# Altium PCB Node_Unit_Board.PcbDoc
Units mm, origin at the board's own origin, x right, y up, seen from the top; angles counter-clockwise.
Board outline 72.39 x 79.25 mm, 2 copper layers (Top Layer, Bottom Layer); 17 components, 15 nets, 100 pads, 0 vias.
Unrouted connection lines stored in the file: 5.
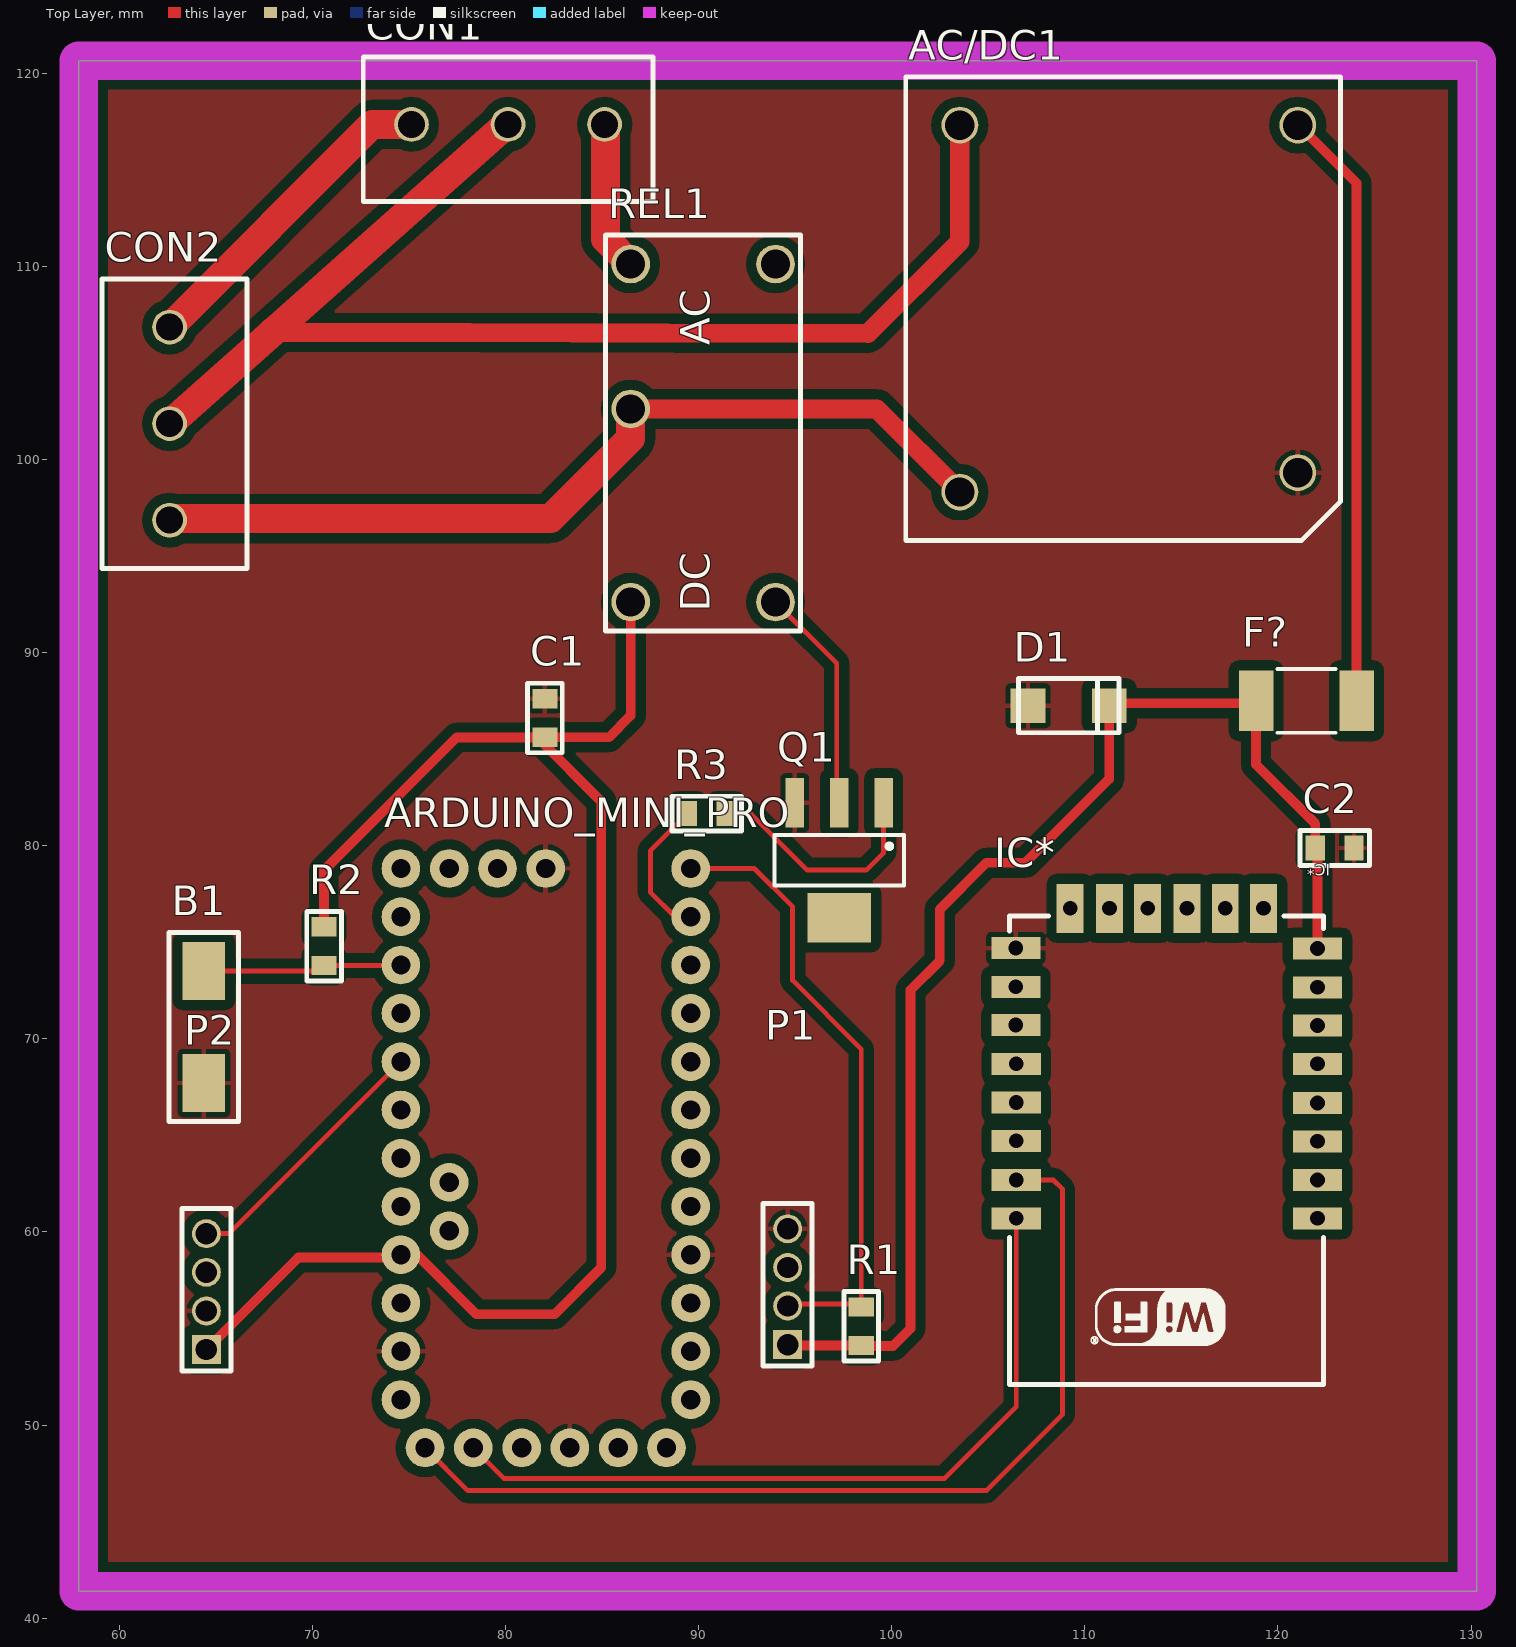
[diagram p0: Top Layer view]
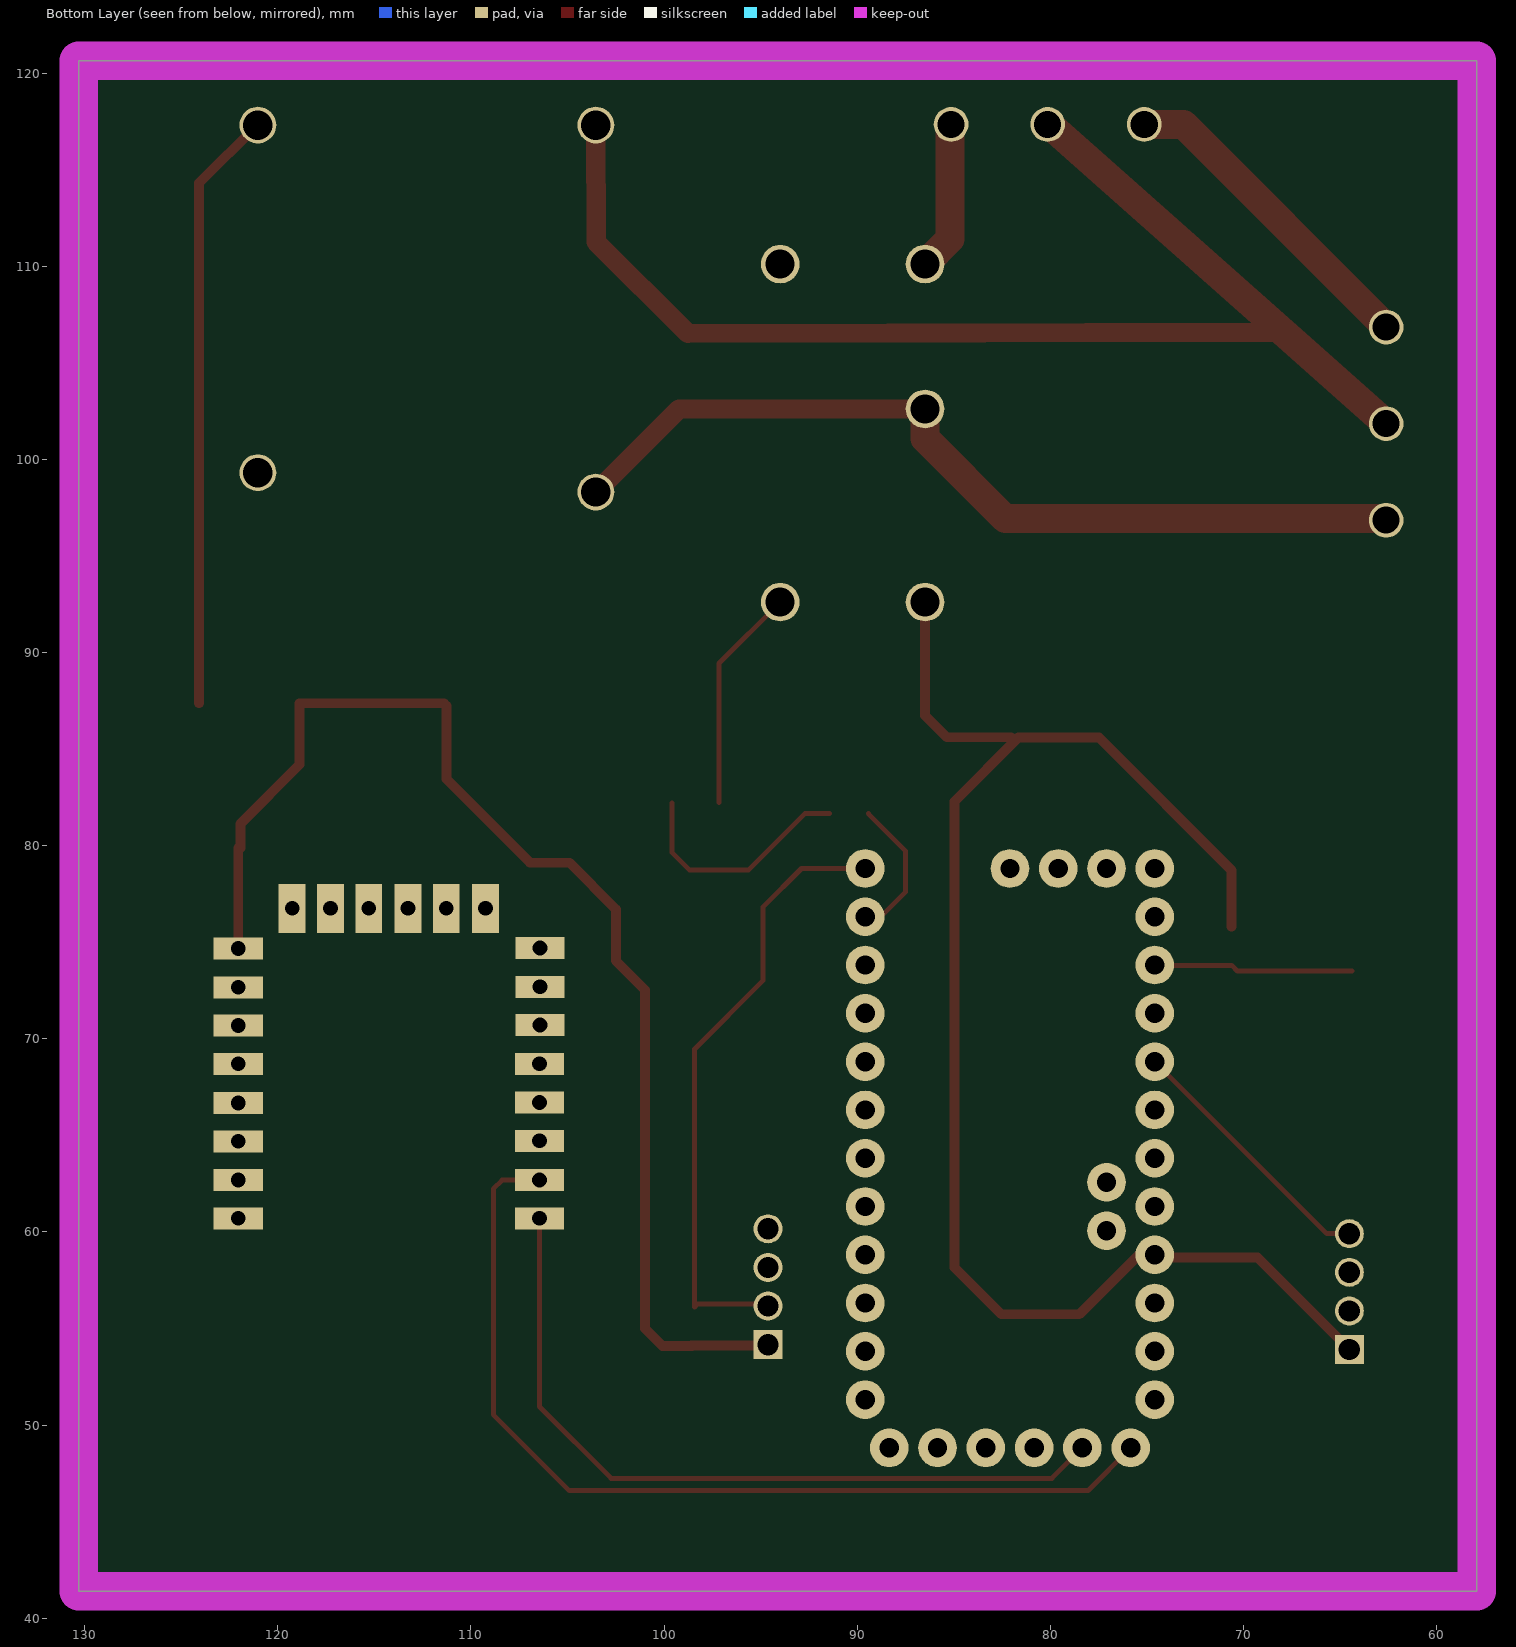
[diagram p1: Bottom Layer view, seen from below]

## Layer stack, top to bottom
Top Solder: solder mask 0.0102, Solder Resist, Dk 3.5
Top Layer: signal copper 0.0356
Dielectric 1: dielectric 0.32, FR-4, Dk 4.8
Bottom Layer: signal copper 0.0356
Bottom Solder: solder mask 0.0102, Solder Resist, Dk 3.5

## Board outline
57.912,120.65 57.912,41.402 130.302,41.402 130.302,120.65

## Design rules (kind name [scope] priority, off if disabled: settings)
Clearance Clearance_Poly [InPoly vs not InNet('GND')] p1: gap=0.508 ignorepadtopadclearanceinfootprint=FALSE
Clearance [All] p2: gap=0.254 ignorepadtopadclearanceinfootprint=FALSE except(0: Arc-Hole Track-Hole SMDPad-Hole THPad-Hole Via-Hole Fill-Hole Poly-Hole Region-Hole Text-Hole)
PolygonConnect [All] p1: connectstyle=Relief reliefconductorwidth=0.254 reliefentries=4 polygonreliefangle="90 Angle" airgapwidth=0.254
RoutingLayers [All] p1: top layer_v5=TRUE bottom layer_v5=FALSE
RoutingVias [All] p1: holewidth=0.711 width=1.27 viastyle="Through Hole" minholewidth=0.711 minwidth=1.27 maxholewidth=0.711 maxwidth=1.27
SilkToSilkClearance [All] p1 off: silktosilkclearance=0.254
SolderMaskExpansion [All] p1: expansion=0.102
Width [All] p1: maxlimit=2 minlimit=0.254 preferedwidth=0.254
28 further rules are at their usual default settings.

## Components (designator, comment, footprint, x,y, rotation, side; value= is the part's Value field where it differs from the comment)
AC/DC1 "AC/DC Converter" "AC/DC Converter" 103.531,117.314 r0 top
ARDUINO_MINI_PRO "ARDUINO_MINI_PRO" ARDUINO_MINI_PRO 87.089,52.821 r180 top
B1 "Button small" FP_BTN_SMD_3x6 64.389,70.612 r270 top
C1 "10uF" FP_0805_CAP_085 82.042,86.614 r90 top
C2 "10uF" FP_0805_CAP_085 122.936,79.883 r0 top
CON1 "Conector_Screws" Serial_Connector 80.137,117.348 r0 top
CON2 "Conector_Screws" Serial_Connector 62.611,101.854 r90 top
D1 "ZENER" FP_SMA 107.061,87.249 r0 top
F? "Multifuse" FP_1812_MULTIFUSE 121.472,87.503 r180 top
IC* "ESP8266 ESP-12-E" "ESP8266 ESP-12-E" 105.461,77.114 r180 top
P1 "Connector" FP_CONN4_TUSKE_2MM 94.615,60.166 r0 top
P2 "Connector" FP_CONN4_TUSKE_2MM 64.516,59.912 r0 top
Q1 "NMOS" FP_SOT223 97.282,79.248 r270 top
R1 "10K" FP_0805_RES 98.425,55.118 r270 top
R2 "10K" FP_0805_RES 70.612,74.803 r270 top
R3 "10K" FP_0805_RES 90.424,81.661 r180 top
REL1 "Power Relay 3VDC" "PowerRelay 3V" 86.487,92.616 r90 top

## Footprints (in the part's own frame and the unit in brackets; to place one, negate y for a bottom-side part, rotate by r counter-clockwise, add the part's x,y. Pads: shape width x height; smd on the part's side, far side on the other; paste and mask are expansions set on the pad)
"AC/DC Converter" [mm]
  round 1.905 hole 1.524: 1(17.5,-18) 2(17.5,0) 3(0,0) 4(0,-19)
  silkscreen extent -2.8,-21.5 19.7,2.5
ARDUINO_MINI_PRO [mm]
  round 2 hole 1: 2(-2.5,-8.5) 2(1.25,4) 3(-2.5,-11) 3(-1.25,4) 4(-2.5,-13.5) 5(-2.5,-16) 6(-2.5,-18.5) 7(-2.5,-21) 8(-2.5,-23.5) 9(-2.5,-26) 10(12.5,-26) 11(12.5,-23.5) 12(12.5,-21) 13(12.5,-18.5) A0(12.5,-16) A1(12.5,-13.5) A2(12.5,-11) A3(12.5,-8.5) A6(7.5,-26) A7(10,-26) GND(-2.5,-6) GND(3.75,4) GND(5,-26) GND(12.5,-1) RAW(12.5,1.5) RST(-2.5,-3.5) RST(6.25,4) RST(12.5,-3.5) RX0(8.75,4) RX1(-2.5,-1) TX0(11.25,4) TX1(-2.5,1.5) VCC(10,-9.75) VCC(10,-7.25) VCC(12.5,-6)
"ESP8266 ESP-12-E" [mil] "ESP8266 ESP-12-E"
  rect 100x45 hole 30: 1(-653,646) 2(-653,568) 3(-653,489) 4(-653,411) 5(-653,331) 6(-653,253) 7(-653,175) 8(-653,96) 15(-38,95) 16(-38,174) 17(-38,252) 18(-39,331) 19(-39,410) 20(-39,488) 21(-39,568) 22(-39,646)
  rect 55x100 hole 30: 9(-543,14) 10(-465,14) 11(-387,14) 12(-307,14) 13(-229,14) 14(-149,14)
  silkscreen extent -665,30 -25,985, body extent -661,37 -31,981, height 86
FP_0805_CAP_085 [mm] "0805 kapacitás YAGEO 0.85mm magas"
  rect 1x1.3 smd: 1(-1,0) 2(1,0)
  silkscreen extent -1.8,-0.9 1.8,0.9, body extent -1,-0.64 1.03,0.64, height 0.85
FP_0805_RES [mm] "0805 ellenállás"
  rect 1x1.3 smd: 1(-1,0) 2(1,0)
  silkscreen extent -1.8,-0.9 1.8,0.9, body extent -1,-0.62 1,0.63, height 0.62
FP_1812_MULTIFUSE [mm]
  rect 1.78x3.15 smd: 1(-2.6,0) 2(2.6,0)
  silkscreen extent -1.5,-1.65 1.5,1.65, body extent -2.36,-1.71 2.36,1.71, height 1.25
FP_BTN_SMD_3x6 [mm] "TACT 3x 6 2P"
  rect 3x2.2 smd: 1(-2.9,0) 2(2.9,0)
  silkscreen extent -4.9,-1.8 4.9,1.8, body extent -2.9,-1.6 2.9,1.6, height 3.5
FP_CONN4_TUSKE_2MM [mm]
  rect 1.5x1.5 hole 1.1: 1(0,-6)
  round 1.5 hole 1.1: 2(0,-4) 3(0,-2) 4(0,0)
  silkscreen extent -1.27,-7.1 1.27,1.3, body extent -1.27,-7.01 1.27,1.29, height 8.54
FP_SMA [mm] "SMA DO-214AC tok"
  rect 1.8x1.8 smd: 1(0,0) 2(4.2,0)
  silkscreen extent -0.5,-1.4 4.7,1.4, body extent -0.5,-1.3 4.7,1.3, height 2.42
FP_SOT223 [mm] "SOT223 package, 3 leads"
  rect 2.55x0.95 smd: 1(-2.975,2.3) 2(-2.975,0) 3(-2.975,-2.3)
  rect 2.55x3.3 smd: 2(2.975,0)
  silkscreen extent -1.3,-3.35 1.3,3.35, body extent -3.5,-3.25 3.5,3.25, height 1.65
"PowerRelay 3V" [mm]
  round 2 hole 1.5: 1(0,0) 2(0,-7.5) 3(17.5,-7.5) 4(17.5,0) 5(10,0)
  silkscreen extent -1.5,-8.8 19,1.3
Serial_Connector [mm]
  round 1.8 hole 1.4: 1(-5,0) 2(0,0) 3(5,0)
  silkscreen extent -7.5,-4 7.5,3.5

## Part data
B1: "Push button"
C1 C2: library part "CAP 10uF", "Capacitor", Tolerance=10%, Voltage=16V, Name="SMD Multilayer Ceramic Capacitor, 0805", Reference=2320856, Supplier=Farnell
D1: "Zener Diode", Name="LITTELFUSE  SMAJ5.0A  TVS Diode, TRANSZORB SMAJ Series, Unidirectional, 5 V, 9.2 V, DO-214AC, 2 Pins", Reference=1827607, Supplier=Farnell, U_Z=24
F?: "1812 Multifuse", Name="PPTC Resettable Fuse, SMD, POLYFUSE 1812L", Reference=1597004, Supplier=Farnell
P1 P2: library part Connector_4pin, "4pin Connector"
Q1: "NXP - BSP030,115 - MOSFET, N CH, 30V, 10A, SOT223", Name="MOSFET Transistor, N Channel, 300mA, 60V, 2.8 ohm, 10V, 2V", Reference=1510761, Supplier=Farnell
R1 R2 R3: library part "RES 10K", "Resistor", Power=125mW, Tolerance=5%, Name="YAGEO (PHYCOMP)  RC0805JR-0710KL  SMD Chip Resistor, Thick Film, 10 kohm", Reference=9234136, Supplier=Farnell
AC/DC1: Name=VTX-214-001-103, Reference=2401019, Supplier=Farnell
CON1 CON2: Name="SORKAPOCS 3 P RM5.00 CZM5/3 (STE) 1mmø 13.5A", Reference=43-06-55, Supplier=Lomex
REL1: Name="PE014F03 -  General Purpose Relay", Reference=2060774, Supplier=Farnell

## Nets (pads, with @x,y where several pads share a name; then routed paths per layer and width w, separated by ;. In a path a pad name is that pad's centre, name@x,y a point inside that pad or via, vN(x,y) a via of type N, cw(c..) or ccw(c..) an arc to the next point about the centre after c; other vN are vias at no path point)
"Analog Gas Sensor": ARDUINO_MINI_PRO.A0 P2.4 | length 13.8
  Top Layer w0.254: P2.4 65.68,59.912 ARDUINO_MINI_PRO.A0
"Digital Temp Sensor": ARDUINO_MINI_PRO.9 P1.2 R1.1 | length 32.2
  Top Layer w0.254: ARDUINO_MINI_PRO.9 92.883,78.821 94.869,76.835 94.869,73.025 98.425,69.469 R1.1 98.282,56.261 P1.2@94.615,56.261
GND: AC/DC1.1 ARDUINO_MINI_PRO.GND B1.2 C1.2 C2.2 D1.1 IC*.15 P1.4 P2.2 Q1.3
NetAC/DC1_2: AC/DC1.2 F?.1 | length 31.3
  Top Layer w0.508: AC/DC1.2 121.031,117.348 124.072,114.307 F?.1 F?.1@124.072,87.376
NetARDUINO_MINI_PRO_8: ARDUINO_MINI_PRO.8 R3.2 | length 8.2
  Top Layer w0.254: R3.2 87.503,79.74 87.503,77.597 88.779,76.321 ARDUINO_MINI_PRO.8 ARDUINO_MINI_PRO.8@90.087,76.819
NetARDUINO_MINI_PRO_12: ARDUINO_MINI_PRO.12 B1.1 R2.2 | length 10.3
  Top Layer w0.254: B1.1 70.321,73.512 R2.2 74.571,73.803 ARDUINO_MINI_PRO.12
NetARDUINO_MINI_PRO_RX0: ARDUINO_MINI_PRO.RX0 IC*.22 | length 40.1
  Top Layer w0.254: ARDUINO_MINI_PRO.RX0 79.916,47.244 102.743,47.244 106.451,50.952 IC*.22
NetARDUINO_MINI_PRO_TX0: ARDUINO_MINI_PRO.TX0 IC*.21 | length 49.8
  Top Layer w0.254: ARDUINO_MINI_PRO.TX0 78.051,46.609 104.902,46.609 108.839,50.546 108.839,62.23 108.382,62.687 IC*.21
NetQ1_2: Q1.2 REL1.2 | length 11.7
  Top Layer w0.254: REL1.2 97.155,89.448 Q1.2@97.155,82.223
"Output Switch": Q1.1 R3.1 | length 12.3
  Top Layer w0.254: R3.1 92.71,81.661 95.631,78.74 98.679,78.74 99.582,79.643 Q1.1
"VAC Line": AC/DC1.4 CON2.1 REL1.5 | length 45.9
  Top Layer w1: REL1.5 99.229,102.616 AC/DC1.4
  Top Layer w1.5: CON2.1@62.611,96.934 82.329,96.934 86.487,101.092 REL1.5
"VAC Neutral": AC/DC1.3 CON1.2 CON2.2 | length 67
  Top Layer w1: 67.945,106.589 98.757,106.524 103.518,111.265 AC/DC1.3
  Top Layer w1.5: CON2.2 67.945,106.589 CON1.2@80.105,117.384
"VAC PE": CON1.1 CON2.3 | length 16.9
  Top Layer w1.5: CON2.3 73.105,117.348 CON1.1
"VAC REL Line": CON1.3 REL1.4 | length 7.8
  Top Layer w1.5: CON1.3@85.184,117.348 85.184,111.419 REL1.4
Vcc: ARDUINO_MINI_PRO.VCC C1.1 C2.1 D1.2 F?.2 IC*.8 P1.1 P2.1 R1.2 R2.1 REL1.1 | length 148.5
  Top Layer w0.254: ARDUINO_MINI_PRO.VCC@74.589,58.821 ARDUINO_MINI_PRO.VCC@75.418,58.821 ; ARDUINO_MINI_PRO.VCC@76.617,60.071 ARDUINO_MINI_PRO.VCC@77.089,60.071 ; P1.1@94.615,53.721 P1.1@95.012,54.118 ; R1.2 R1.2@98.575,54.118 ; D1.2 D1.2@111.388,87.376 ; IC*.8@121.349,74.676 IC*.8
  Top Layer w0.508: P2.1 69.278,58.674 ARDUINO_MINI_PRO.VCC@74.589,58.674 ; R2.1 70.612,78.732 77.478,85.598 81.661,85.598 84.963,82.296 84.963,58.166 82.534,55.737 78.502,55.737 ARDUINO_MINI_PRO.VCC@75.418,58.821 ; C1.1 85.36,85.614 86.487,86.741 REL1.1 ; P1.1@95.012,54.118 R1.2 ; R1.2@98.575,54.118 98.559,54.102 100.076,54.102 100.98,55.006 100.98,72.532 102.489,74.041 102.489,76.708 104.902,79.121 106.934,79.121 111.261,83.448 D1.2 ; D1.2@111.388,87.376 118.872,87.376 118.872,84.201 121.936,81.137 C2.1 ; IC*.8 C2.1@122.047,79.883
pads on no net: ARDUINO_MINI_PRO.2 ARDUINO_MINI_PRO.3 ARDUINO_MINI_PRO.4 ARDUINO_MINI_PRO.5 ARDUINO_MINI_PRO.6 ARDUINO_MINI_PRO.7 ARDUINO_MINI_PRO.10 ARDUINO_MINI_PRO.11 ARDUINO_MINI_PRO.13 ARDUINO_MINI_PRO.A1 ARDUINO_MINI_PRO.A2 ARDUINO_MINI_PRO.A3 ARDUINO_MINI_PRO.A6 ARDUINO_MINI_PRO.A7 ARDUINO_MINI_PRO.RAW ARDUINO_MINI_PRO.RST ARDUINO_MINI_PRO.RX1 ARDUINO_MINI_PRO.TX1 IC*.1 IC*.2 IC*.3 IC*.4 IC*.5 IC*.6 IC*.7 IC*.9 IC*.10 IC*.11 IC*.12 IC*.13 IC*.14 IC*.16 IC*.17 IC*.18 IC*.19 IC*.20 P1.3 P2.3 REL1.3

## Polygon pours and split planes (outlines as drawn)
GND on Top Layer "Top GND Polygon" (solid, remove dead copper, pour order 0): 58.547,120.015 58.547,41.91 129.667,41.91 129.794,42.037 129.794,120.015

## Keep-outs
Keep-Out Layer:
  the board outline again, w2

## Text inside footprints (layer, text, board x,y; h text height)
IC*: Mechanical 13 "ANTENNA AREA" at 122.046,52.715 h0.25 r180; Mechanical 13 "CUTOUT POLYGON" at 122.046,53.223 h0.25 r180
REL1: Top Overlay "AC" at 90.587,105.916 h1.52 r90; Top Overlay "DC" at 90.587,92.116 h1.52 r90